# Altium PCB unrouted.PcbDoc
Units mil, origin at the board's own origin, x right, y up, seen from the top; angles counter-clockwise.
Board outline 1135 x 2850 mil, 2 copper layers (Top Layer, Bottom Layer); 54 components, 49 nets, 266 pads, 31 vias.
Unrouted connection lines stored in the file: 91.
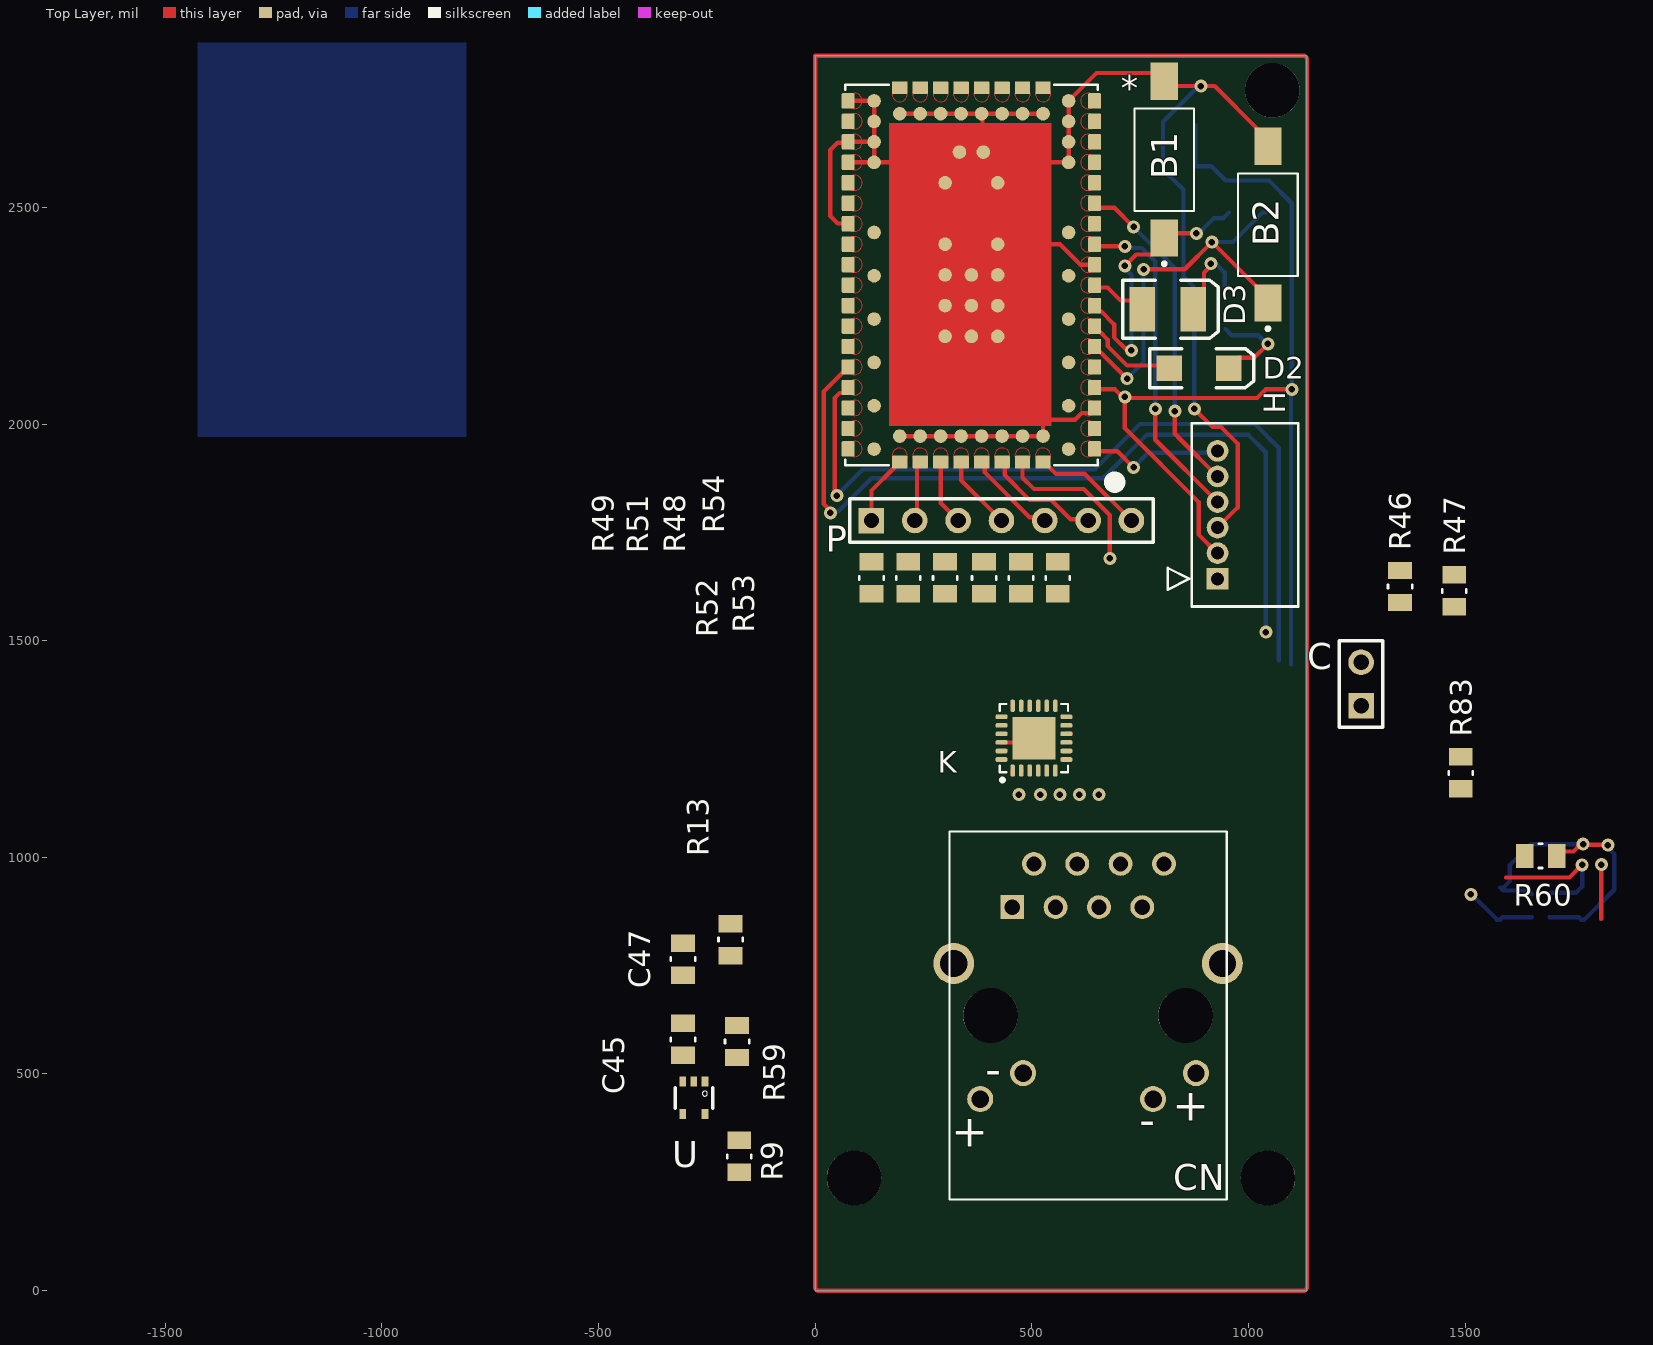
[diagram p0: Top Layer view]
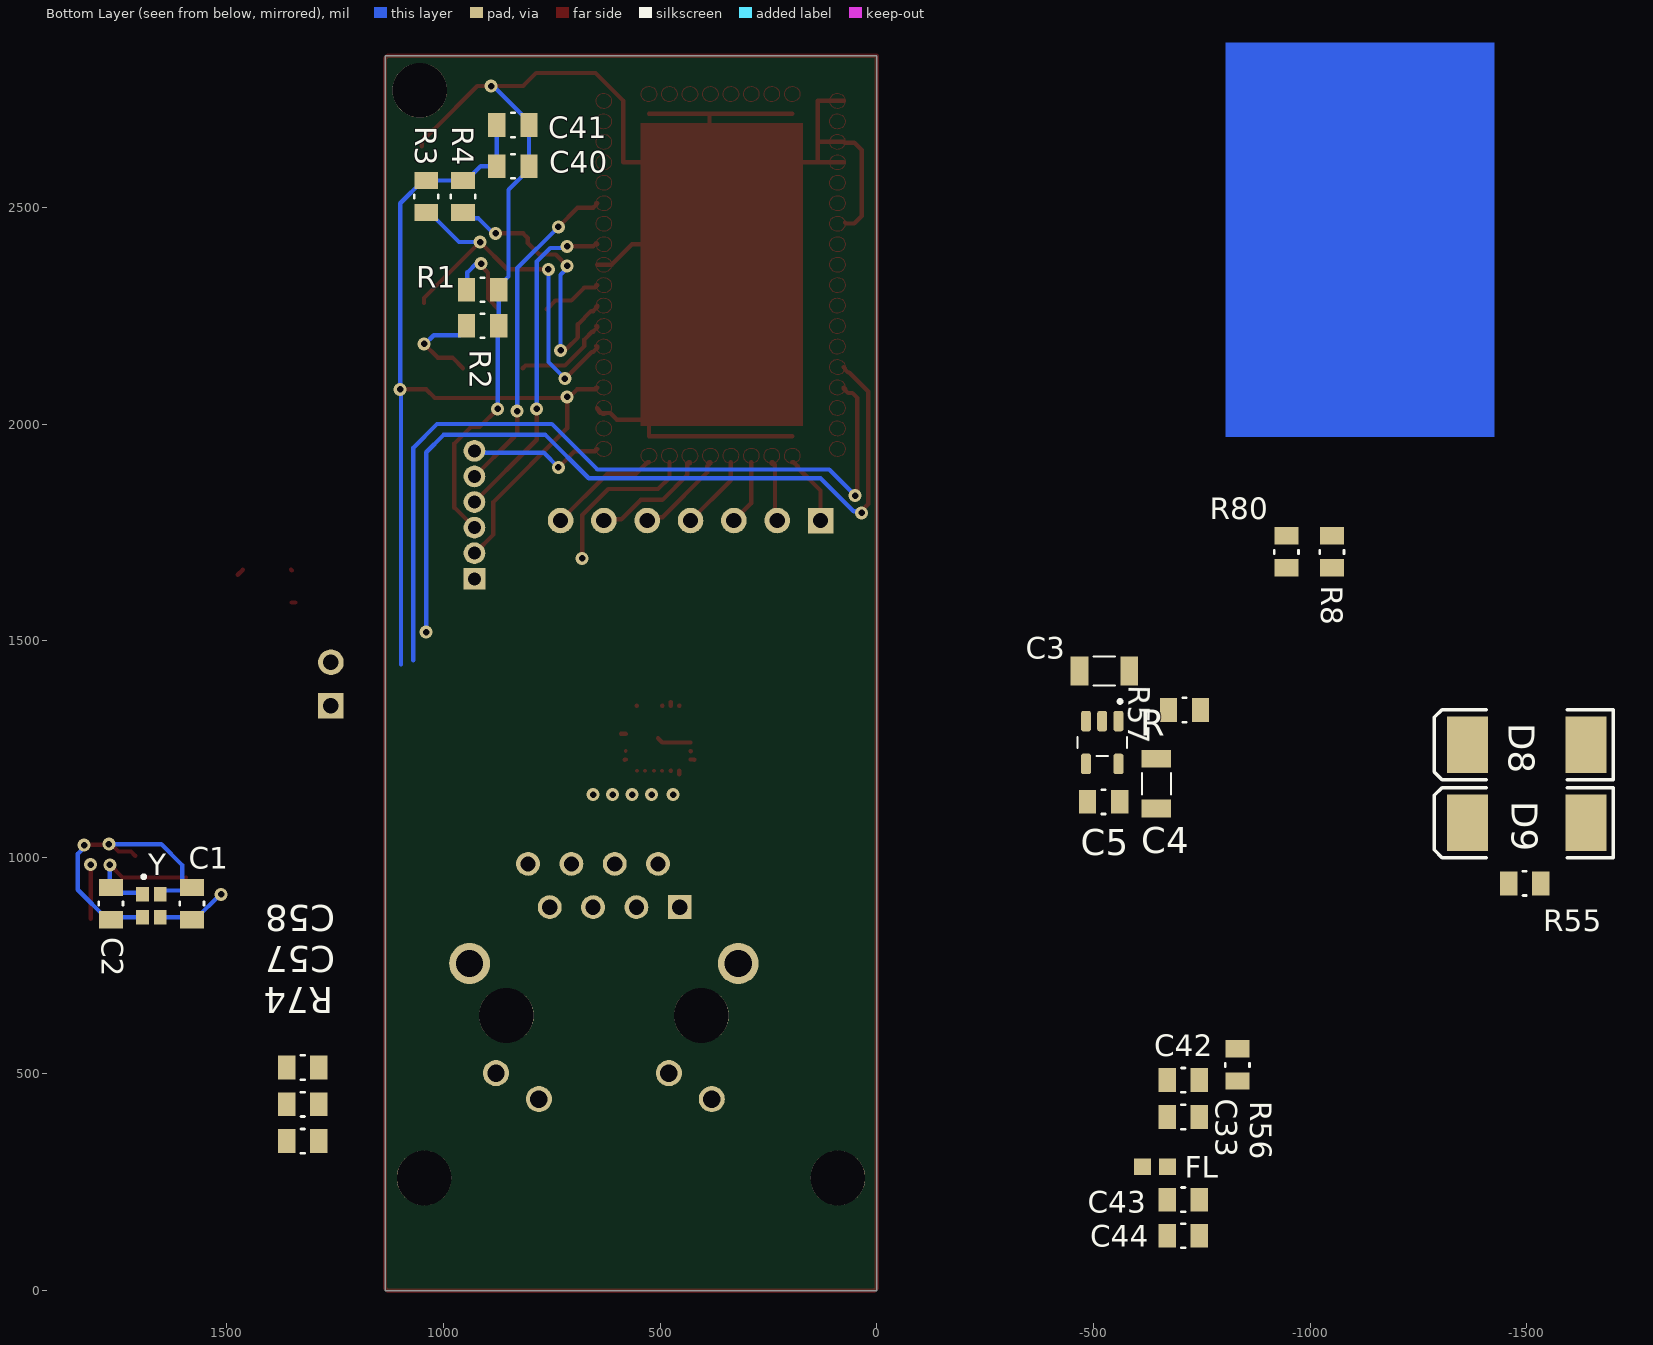
[diagram p1: Bottom Layer view, seen from below]

## Layer stack, top to bottom
Top Solder: solder mask 0.4, Solder Resist, Dk 3.5
Top Layer: signal copper 1.4
Dielectric 1: dielectric 12.6, FR-4, Dk 4.8
Bottom Layer: signal copper 1.4
Bottom Solder: solder mask 0.4, Solder Resist, Dk 3.5

## Board outline
0,2850 0,0 1135,0 1135,2850

## Design rules (kind name [scope] priority, off if disabled: settings)
Clearance [All] p1: gap=5 ignorepadtopadclearanceinfootprint=FALSE // Default=10mil
DiffPairsRouting [All] p1: maxlimit=10 minlimit=10 mostfreqgap=10 toplayer_minwidth=8 toplayer_maxwidth=15 toplayer_prefwidth=15 bottomlayer_minwidth=15 bottomlayer_maxwidth=15 bottomlayer_prefwidth=15 maxuncoupledlength=500 // DefaultMinWidth=15mil
HoleSize [All] p1: absolutevalues=TRUE maxlimit=150 minlimit=1 maxpercent=80.000 minpercent=20.000 // MaximumDefault=100mil
MinimumSolderMaskSliver [All] p1: minsoldermaskwidth=1 // Default=10mil
PolygonConnect [All] p1: connectstyle=Relief reliefconductorwidth=10 reliefentries=4 polygonreliefangle="90 Angle" airgapwidth=10
RoutingVias [All] p1: holewidth=28 width=50 viastyle="Through Hole" minholewidth=28 minwidth=50 maxholewidth=28 maxwidth=50
SilkToSolderMaskClearance [IsPad] p1: minsilkscreentomaskgap=4 clearancetoexposedcopper=TRUE // Default=10mil
SolderMaskExpansion [All] p1: expansion=4 istentingtop=FALSE
Width [All] p1: maxlimit=10 minlimit=5 preferedwidth=10 toplayer_prefwidth=8 minimp=50.000000 maximp=50.000000 favimp=50.000000 // MinWidthDefault=10mil
26 further rules are at their usual default settings.

## Classes and differential pairs
differential pair PHY_TX: +PHY_TX_P -PHY_TX_N
differential pair PHY_RX: +PHY_RX_P -PHY_RX_N

## Components (designator, comment, footprint, x,y, rotation, side; value= is the part's Value field where it differs from the comment)
* "ODIN-W262" ODIN-W262 360.63,2344.13 r90 top
B1 "push button" TECO-FSMSM 805.68,2610 r90 top
B2 "push button" TECO-FSMSM 1045,2460 r90 top
C "Header 2" HDR1X2 1260,1350 r90 top
C1 "22uF 10V" 0805 1580.84,893.36 r90 bottom value=22uF
C2 "22uF 10V" 0805 1767.82,893.36 r270 bottom value=22uF
C3 "10UF 25V" 1206 -525,1430 r0 bottom value=10uF
C4 "10UF 25V" 1206 -645.09,1170 r270 bottom value=10uF
C5 "10nF 50V" 0805 -523.17,1128.12 r180 bottom value=10nF
C33 "2.2uF 16V" 0805 -707,400.94 r0 bottom value=2.2uF
C40 "100nF 50V" 0805 840,2595 r0 bottom value=100nF
C41 "100nF 50V" 0805 840,2690 r0 bottom value=100nF
C42 "100nF 50V" 0805 -707,485.94 r0 bottom value=100nF
C43 "2.2uF 16V" 0805 -707,209.96 r0 bottom value=2.2uF
C44 "100nF 50V" 0805 -707,126.68 r0 bottom value=100nF
C45 "100nF 50V" 0805 -305,580 r90 top value=100nF
C47 "100nF 50V" 0805 -305,765 r270 top value=100nF
C57 "100nF 50V" 0805 1325,430 r180 bottom value=100nF
C58 "100nF 50V" 0805 1325,515 r180 bottom value=100nF
CN "CN J00-0045NL" "RJ45 J00-0045NL" 630,635 r180 top
D2 "LED2" 3.2X1.6X1.1 886.1,2128.79 r0 top
D3 "LED3" 3.5X2.8X1.9 814.06,2265 r0 top
D8 "Diode" SMC -1500,1260 r0 bottom
D9 "Diode" SMC -1500,1080 r0 bottom
FL "BLM18PG300SN1D" BEADC1608X95N -642,285.94 r180 bottom
H "S6B-ZR(LF)(SN)" S6B-ZR_JST 928.78,1642.83 r90 top
K "KSZ8081RNAIA-TR" QFN50P400X400X90-25N 505,1275 r90 top
P "Header 7" HDR1X7 130,1777.23 r0 top
R "LP2992IM5-1.8" SOT95P280X145-5N -520,1265 r270 bottom
R1 "270" 0805 910,2310 r0 bottom
R2 "270" 0805 910,2226.72 r0 bottom
R3 "1k" 0805 1040,2525 r90 bottom
R4 "1k" 0805 955,2525 r90 bottom
R8 "JUMPER" 0805 -1050,1705 r90 bottom value=0
R9 "120" 0805 -175,310 r90 top
R13 "1k" 0805 -195,810 r270 top
R46 "10.0" 0805 1350,1625 r90 top
R47 "10.0" 0805 1475,1615 r90 top
R48 "10.0" 0805 300,1645 r270 top
R49 "10.0" 0805 130,1645 r270 top
R51 "10.0" 0805 215,1645 r270 top
R52 "10.0" 0805 475,1645 r90 top
R53 "10.0" 0805 560,1645 r90 top
R54 "10.0" 0805 390,1645 r90 top
R55 "1k" 0805 -1495,940 r0 bottom
R56 "1k" 0805 -832,520.94 r270 bottom
R57 "1k" 0805 -710,1340 r180 bottom
R59 "1k" 0805 -180,575 r270 top
R60 "6.8k" 0805 1674.33,1003.43 r180 top
R74 "16m" 0805 1325,345 r0 bottom
R80 "JUMPER" 0805 -945,1705 r90 bottom value=0
R83 "4.7k" 0805 1490,1195 r270 top
U "NC7SZ125" SC70-5 -280,445 r180 top
Y "ECS-250-10-37-JTN-TR" XTAL_ECS-250-10-37-JTN-TR 1674.33,888.43 r270 bottom

## Footprints (in the part's own frame and the unit in brackets; to place one, negate y for a bottom-side part, rotate by r counter-clockwise, add the part's x,y. Pads: shape width x height; smd on the part's side, far side on the other; paste and mask are expansions set on the pad)
3.2X1.6X1.1 [mm]
  rect 1.5x1.5 smd: 1(-1.75,0) 2(1.75,0)
  silkscreen extent -2.9,-1.15 3.2,1.15
3.5X2.8X1.9 [mm] "SM LED; 2 C-Bend Leads; Body 3.5 x 2.8 x 1.9 mm, inc leads (LxWxH typ)"
  rect 1.5x2.6 smd: 1(-1.5,0) 2(1.5,0)
  silkscreen extent -2.65,-1.7 2.95,1.7
0805 [mil]
  rect 40x55 smd: 1(-37,0) 2(37,0)
  silkscreen extent -4,-28 4,28
1206 [mm]
  rect 1.05x1.72 smd: 1(-1.46,0) 2(1.46,0)
  silkscreen extent -0.62,-0.85 0.62,0.85
BEADC1608X95N [mm]
  rect 1x0.97 smd: 1(-0.735,0) 2(0.735,0)
HDR1X2 [mm] "Connector; Header; 2 Position"
  rect 1.5x1.5 hole 0.9: 1(0,0)
  round 1.5 hole 0.9: 2(2.54,0)
  silkscreen extent -1.27,-1.27 3.81,1.27
HDR1X7 [mm] "Connector; Header; 7 Position"
  rect 1.5x1.5 hole 0.9: 1(0,0)
  round 1.5 hole 0.9: 2(2.54,0) 3(5.08,0) 4(7.62,0) 5(10.16,0) 6(12.7,0) 7(15.24,0)
  silkscreen extent -1.27,-1.27 16.51,1.27
ODIN-W262 [mm]
  round 0.8 smd: 1(6.6,-5.7) 2(7.8,-5.7) 3(9,-5.7) 4(10.2,-5.7) 5(9.45,-4.2) 6(9.45,-3) 7(9.45,-1.8) 8(9.45,-0.6) 9(9.45,0.6) 10(9.45,1.8) 11(9.45,3) 12(9.45,4.2) 13(10.2,5.7) 14(9,5.7) 15(7.8,5.7) 16(6.6,5.7) 17(-9.45,4.2) 18(-9.45,3) 19(-9.45,1.8) 20(-9.45,0.6) 21(-9.45,-0.6) 22(-9.45,-1.8) 23(-9.45,-3) 24(-9.45,-4.2) 25(-3.6,-1.54) 26(-1.8,-1.54) 27(0,-1.54) 28(1.8,-1.54) 29(5.4,-1.54) 30(7.2,-0.7) 31(-3.6,0) 32(-1.8,0) 33(0,0) 34(-3.6,1.54) 35(-1.8,1.54) 36(0,1.54) 37(1.8,1.54) 38(5.4,1.54) 39(7.2,0.7) TP1(2.49,-5.7) TP2(2.49,5.7) TP3(-0.05,-5.7) TP4(-0.05,5.7) TP5(-2.59,-5.7) TP6(-2.59,5.7) TP7(-5.13,-5.7) TP8(-5.13,5.7) TP9(-7.67,-5.7) TP10(-7.67,5.7) TP11(-10.21,-5.7) TP12(-10.21,5.7)
  rrect15% 0.9x0.75 smd paste-1 mask+0: A1(-10.2,-7.225) A2(-9,-7.225) A3(-7.8,-7.225) A4(-6.6,-7.225) A5(-5.4,-7.225) A6(-4.2,-7.225) A7(-3,-7.225) A8(-1.8,-7.225) A9(-0.6,-7.225) A10(0.6,-7.225) A11(1.8,-7.225) A12(3,-7.225) A13(4.2,-7.225) A14(5.4,-7.225) A15(6.6,-7.225) A16(7.8,-7.225) A17(9,-7.225) A18(10.2,-7.225) C1(10.2,7.225) C2(9,7.225) C3(7.8,7.225) C4(6.6,7.225) C5(5.4,7.225) C6(4.2,7.225) C7(3,7.225) C8(1.8,7.225) C9(0.6,7.225) C10(-0.6,7.225) C11(-1.8,7.225) C12(-3,7.225) C13(-4.2,7.225) C14(-5.4,7.225) C15(-6.6,7.225) C16(-7.8,7.225) C17(-9,7.225) C18(-10.2,7.225)
  rrect15% 0.75x0.9 smd paste-1 mask+0: B1(10.975,-4.2) B2(10.975,-3) B3(10.975,-1.8) B4(10.975,-0.6) B5(10.975,0.6) B6(10.975,1.8) B7(10.975,3) B8(10.975,4.2) D1(-10.975,4.2) D2(-10.975,3) D3(-10.975,1.8) D4(-10.975,0.6) D5(-10.975,-0.6) D6(-10.975,-1.8) D7(-10.975,-3) D8(-10.975,-4.2)
  Top Layer circle w0: c4.2,-6.85 r0.45
  Top Layer circle w0: c3,-6.85 r0.45
  Top Layer circle w0: c5.4,-6.85 r0.45
  Top Layer circle w0: c6.6,-6.85 r0.45
  Top Layer circle w0: c7.8,-6.85 r0.45
  Top Layer circle w0: c9,-6.85 r0.45
  Top Layer circle w0: c10.2,-6.85 r0.45
  Top Layer circle w0: c-9,-6.85 r0.45
  Top Layer circle w0: c-5.4,-6.85 r0.45
  Top Layer circle w0: c1.8,6.85 r0.45
  Top Layer circle w0: c0.6,6.85 r0.45
  Top Layer circle w0: c-0.6,6.85 r0.45
  Top Layer circle w0: c-1.8,6.85 r0.45
  Top Layer circle w0: c-3,6.85 r0.45
  Top Layer circle w0: c-4.2,6.85 r0.45
  Top Layer circle w0: c-7.8,6.85 r0.45
  Top Layer circle w0: c-9,6.85 r0.45
  Top Layer circle w0: c-10.2,6.85 r0.45
  Top Layer circle w0: c9,6.85 r0.45
  Top Layer circle w0: c5.4,6.85 r0.45
  Top Layer circle w0: c4.2,6.85 r0.45
  Top Layer circle w0: c10.6,-4.2 r0.45
  Top Layer circle w0: c10.6,-3 r0.45
  Top Layer circle w0: c10.6,-1.8 r0.45
  Top Layer circle w0: c10.6,-0.6 r0.45
  Top Layer circle w0: c10.6,0.6 r0.45
  Top Layer circle w0: c10.6,1.8 r0.45
  Top Layer circle w0: c10.6,3 r0.45
  Top Layer circle w0: c10.6,4.2 r0.45
  Top Layer circle w0: c10.2,6.85 r0.45
  Top Layer circle w0: c-3,-6.85 r0.45
  Top Layer lines w0: -5.414,7.3 cw(c-5.4,6.85) -5.4,6.4 cw(c-5.4,6.85) -5.667,6.488 cw(c-5.4,6.85) -5.486,7.292 cw(c-5.4,6.85) -5.414,7.3 ; 2.968,7.299 ccw(c3,6.85) 3,6.4 ccw(c3,6.85) 3.131,7.281 ccw(c3,6.85) 3.07,7.295 ccw(c3,6.85) 2.968,7.299 ; 6.53,7.295 ccw(c6.6,6.85) 6.6,6.4 ccw(c6.6,6.85) 6.53,7.295 ; -6.731,7.281 cw(c-6.6,6.85) -6.6,6.4 cw(c-6.6,6.85) -6.731,7.281 ; 7.669,7.281 cw(c7.8,6.85) 7.8,6.4 cw(c7.8,6.85) 7.669,7.281 ; -11.031,4.331 cw(c-10.6,4.2) -10.6,3.75 cw(c-10.6,4.2) -11.045,4.13 cw(c-10.6,4.2) -11.05,4.2 cw(c-10.6,4.2) -11.05,4.207 cw(c-10.6,4.2) -11.047,4.251 cw(c-10.6,4.2) -11.045,4.27 cw(c-10.6,4.2) -11.042,4.286 cw(c-10.6,4.2) -11.031,4.331 ; -11.037,3.107 ccw(c-10.6,3) -11.045,3.07 ccw(c-10.6,3) -11.05,3 ccw(c-10.6,3) -10.6,2.55 ccw(c-10.6,3) -11.037,3.107 ; -11.05,1.8 ccw(c-10.6,1.8) -10.6,1.35 ccw(c-10.6,1.8) -11.05,1.8 ; -11.047,0.651 ccw(c-10.6,0.6) -11.05,0.6 ccw(c-10.6,0.6) -11.031,0.469 ccw(c-10.6,0.6) -10.6,0.15 ccw(c-10.6,0.6) -11.047,0.651 ; -11.05,-0.6 cw(c-10.6,-0.6) -10.6,-1.05 cw(c-10.6,-0.6) -11.031,-0.731 cw(c-10.6,-0.6) -11.05,-0.619 cw(c-10.6,-0.6) -11.05,-0.6 ; -11.048,-1.762 ccw(c-10.6,-1.8) -11.05,-1.8 ccw(c-10.6,-1.8) -11.045,-1.87 ccw(c-10.6,-1.8) -11.039,-1.901 ccw(c-10.6,-1.8) -11.031,-1.931 ccw(c-10.6,-1.8) -10.6,-2.25 ccw(c-10.6,-1.8) -11.048,-1.762 ; -11.031,-2.869 cw(c-10.6,-3) -10.6,-3.45 cw(c-10.6,-3) -11.031,-3.131 cw(c-10.6,-3) -11.034,-3.118 cw(c-10.6,-3) -11.042,-3.086 cw(c-10.6,-3) -11.043,-3.076 cw(c-10.6,-3) -11.049,-3.032 cw(c-10.6,-3) -11.05,-3 cw(c-10.6,-3) -11.031,-2.869 ; -11.05,-4.2 cw(c-10.6,-4.2) -10.6,-4.65 cw(c-10.6,-4.2) -10.975,-4.449 cw(c-10.6,-4.2) -11.031,-4.331 cw(c-10.6,-4.2) -11.05,-4.2 ; 0.6,-6.4 ccw(c0.6,-6.85) 0.6,-7.3 ccw(c0.6,-6.85) 0.6,-6.4 ; -8.067,-6.488 cw(c-7.8,-6.85) -7.8,-7.3 cw(c-7.8,-6.85) -8.098,-6.513 cw(c-7.8,-6.85) -8.067,-6.488 ; -10.069,-7.281 cw(c-10.2,-6.85) -10.114,-7.292 cw(c-10.2,-6.85) -10.2,-7.3 cw(c-10.2,-6.85) -10.27,-7.295 cw(c-10.2,-6.85) -10.069,-7.281 ; -0.514,-7.292 ccw(c-0.6,-6.85) -0.67,-7.295 ccw(c-0.6,-6.85) -0.6,-7.3 ccw(c-0.6,-6.85) -0.514,-7.292 ; -6.67,-7.295 ccw(c-6.6,-6.85) -6.6,-7.3 ccw(c-6.6,-6.85) -6.67,-7.295 ; -1.87,-7.295 cw(c-1.8,-6.85) -1.8,-7.3 cw(c-1.8,-6.85) -1.87,-7.295 ; 1.87,-7.295 cw(c1.8,-6.85) 1.849,-7.297 cw(c1.8,-6.85) 1.8,-7.3 cw(c1.8,-6.85) 1.87,-7.295 ; -4.169,-7.299 cw(c-4.2,-6.85) -4.2,-7.3 cw(c-4.2,-6.85) -4.169,-7.299
  silkscreen extent -12.4,-8.65 11.15,7.4, body extent -11.15,-7.4 11.15,7.4, height 4.8
QFN50P400X400X90-25N [mm]
  rrect70% 0.71x0.27 smd: 1(-1.9,1.25) 2(-1.9,0.75) 3(-1.9,0.25) 4(-1.9,-0.25) 5(-1.9,-0.75) 6(-1.9,-1.25) 13(1.9,-1.25) 14(1.9,-0.75) 15(1.9,-0.25) 16(1.9,0.25) 17(1.9,0.75) 18(1.9,1.25)
  rrect70% 0.27x0.71 smd: 7(-1.25,-1.9) 8(-0.75,-1.9) 9(-0.25,-1.9) 10(0.25,-1.9) 11(0.75,-1.9) 12(1.25,-1.9) 19(1.25,1.9) 20(0.75,1.9) 21(0.25,1.9) 22(-0.25,1.9) 23(-0.75,1.9) 24(-1.25,1.9)
  rect 2.5x2.5 smd paste-2: 25(0,0)
  silkscreen extent -2.55,-2 2,2
"RJ45 J00-0045NL" [mm]
  rect 1.398x1.398 hole 0.89: 1(4.445,-6.35)
  round 1.398 hole 0.89: 2(3.175,-8.89) 3(1.905,-6.35) 4(0.635,-8.89) 5(-0.635,-6.35) 6(-1.905,-8.89) 7(-3.175,-6.35) 8(-4.445,-8.89)
  round 1.53 hole 1.02: 9(6.325,4.9) 10(3.81,3.38) 11(-3.81,4.9) 12(-6.325,3.38)
  round 3.2 hole 3.2 unplated: None(-5.715,0) None(5.715,0)
  round 2.4 hole 1.6: S1(-7.875,-3.05) S2(7.875,-3.05)
  silkscreen extent -8.13,-10.8 8.13,10.8
S6B-ZR_JST [mil]
  rect 50x50 hole 30 mask+0: 1(0,0)
  round 50 hole 30 mask+0: 2(59.06,0) 3(118.11,0) 4(177.17,0) 5(236.22,0) 6(295.28,0)
  silkscreen extent -64,-186 359,115, body extent 0,0 10,10, height 10
SC70-5 [mm]
  rect 0.4x0.6 smd: 1(-0.65,-0.95) 2(0,-0.95) 3(0.65,-0.95) 4(0.65,0.95) 5(-0.65,0.95)
  silkscreen extent -1.1,-0.6 1.1,0.6
SMC [mm] "DO-214-AB/SMC; 2 C-Bend Leads; Body 7.9 x 5.9 mm, inc. leads (LxW)"
  rect 2.4x3.3 smd: 1(-3.475,0) 2(3.475,0)
  silkscreen extent -5.07,-2.05 5.43,2.05
SOT95P280X145-5N [mm]
  rrect50% 1.21x0.59 smd: 1(-1.255,0.95) 2(-1.255,0) 3(-1.255,-0.95) 4(1.255,-0.95) 5(1.255,0.95)
  silkscreen extent -2.51,-1.45 0.8,1.45
TECO-FSMSM [mm]
  rect 2.19x1.6 smd: 1(-4.59,0) 2(4.59,0)
  silkscreen extent -6.2,-1.75 3,1.75
XTAL_ECS-250-10-37-JTN-TR [mm]
  rect 0.85x0.75 smd: 1(-0.675,-0.525) 2(0.675,-0.525) 3(0.675,0.525) 4(-0.675,0.525)
  silkscreen extent -1.8,-0.55 -1.6,-0.35

## Part data
B1 B2: library part Teco-FSMSM
C: "Header, 2-Pin", LatestRevisionDate=17-Jul-2002, LatestRevisionNote="Re-released for DXP Platform.", Publisher="Altium Limited"
C1 C2: library part "CAP 22uF 10V", "CAP CER 2.2UF 10V X5R 0805", Operating Temperature="-55°C ~ 85°C", Package=0805, Rating=10V, Temperature Coefficient=X5R, Tolerance=20%
C3 C4: library part "CAP 10uF 25V", "CAP CER 10UF 25V X5R 1206", Operating Temperature="-55°C ~ 85°C", Package=1206, Rating=25V, Temperature Coefficient=X5R, Tolerance=10%
C5: library part "CAP 10nF 50V", "CAP CER 10000PF 50V X7R 0805", Operating Temperature="-55°C ~ 125°C", Package=0805, Rating=50V, Temperature Coefficient=X7R, Tolerance=10%
C33 C43: library part "CAP 2.2uF 16V", "CAP CER 2.2UF 16V X7R 0805", Operating Temperature="-55°C ~ 125°C", Package=0805, Rating=16V, Temperature Coefficient=X7R, Tolerance=10%
C40 C41 C42 C44 C45 C47 C57 C58: library part "CAP 100nF 50V", "CAP CER 0.1UF 50V X7R 0805", Package=0805, Rating=50V, Tolerance=10%
CN: library part "CN MAGJACK", "CN MAGJACK 1PORT 100 BASE-TX", Package=None, Supplier Part Number 1=673-J00-0045NL, Digikey=553-1619-5-ND, Digikey Link=https://www.digikey.com/product-detail/en/pulse-electronics-network/J00-0045NL/553-1619-5-ND/1036860?utm_source=snapeda&utm_medium=aggregator&utm_campaign=symbol, MF="Pulse Electronics", MP=J00-0045NL, SnapEDA_Link=https://www.snapeda.com/parts/J00-0045NL/Pulse%20Electronics%20Network/view-part/87956/?ref=snap, Supplier 1=Mouser
D2: library part "LED RED SMD", "Typical RED, GREEN, YELLOW, AMBER GaAs LED", Color=Red, Current - Test=20mA, Lens Color=Colorless, Package=1206, Voltage - Forward (Vf) (Typ)=1.7V, Lens Transparency=Clear
D3: "Typical BLUE SiC LED", DatasheetVersion=16-Apr-2002, LatestRevisionDate=17-Dec-2003, LatestRevisionNote="PCB Footprint replaced.", PackageDescription="SM LED; 2 C-Bend Leads; Body 3.5 x 2.8 x 1.9 mm, inc leads (LxWxH typ)", PackageReference=3.5X2.8X1.9, PackageVersion=16-Apr-2002, Published=8-Jun-2000, Publisher="Altium Limited"
D8 D9: "Default Diode", Code_JEDEC=DO-214-AB, LatestRevisionDate=17-Jul-2002, LatestRevisionNote="Re-released for DXP Platform.", PackageDescription="DO-214-AB/SMC; 2 C-Bend Leads; Body 7.9 x 5.9 mm, inc. leads (LxW)", PackageReference=SMC, PackageVersion=Sep-1996, Published=8-Jun-2000, Publisher="Altium Limited"
FL: "30 Ohms @ 100MHz 1 Power Line Ferrite Bead 0603 _1608 Metric_ 1A 50mOhm", Package="1608 Murata", Availability=Unavailable, MF=Murata, MP=BLM18PG300SN1D, Price=None, SnapEDA_Link=https://www.snapeda.com/parts/BLM18PG300SN1D/Murata/view-part/270173/?ref=snap
H: "No Description Available", Built_By=EMA_UL_Team, Copyright="Copyright (C) 2018 Accelerated Designs. All rights reserved", Manufacturer_Part_Number=S6B-ZR(LF)(SN), RefDes=RefDes, SourceLibrary=JST_2017-04-18, Type=DEV, Vendor=JST
K: "1/1 Transceiver Full RMII 24-QFN _4x4_", Package="QFN-24 Microchip", Availability=Unavailable, MF=Microchip, MP=KSZ8081RNAIA-TR, Price=None, SnapEDA_Link=https://www.snapeda.com/parts/KSZ8081RNAIA-TR/Microchip/view-part/482545/?ref=snap
P: "Header, 7-Pin", LatestRevisionDate=17-Jul-2002, LatestRevisionNote="Re-released for DXP Platform.", Publisher="Altium Limited"
R: Package=None, Availability=Unavailable, MP=LP2992IM5-1.8/NOPB, Price=None
R1 R2: library part "RES 270 1/8W", "RES SMD 270 OHM 5% 1/8W 0805", Package=0805, Power (Watts)=0.125W, Tolerance=5%
R3 R4 R13 R55 R56 R57 R59: library part "RES 1k 1/8W", "RES SMD 1K OHM 5% 1/8W 0805", Package=0805, Power (Watts)=0.125W, Tolerance=5%
R8 R80: library part "RES 0 JUMPER", "RES SMD 0 OHM JUMPER GENERIC 0805", Package=0805
R9: library part "RES 120.0 1/8W", "RES SMD 120 OHM 5% 1/8W 0805", Package=0805, Power (Watts)=0.125W, Tolerance=5%
R46 R47 R48 R49 R51 R52 R53 R54: library part "RES 10.0 1/8W - 5%", "RES SMD 10.0 OHM 5% 1/8W 0805", Package=0805, Power (Watts)=0.125W, Tolerance=5%
R60: library part "RES 6.8k 1/8W", "RES SMD 6.8K OHM 5% 1/8W 0805", Package=0805, Power (Watts)=0.125W, Tolerance=5%
R74: library part "RES 16m 1/2W", "RES SMD 0.016 OHM 1% 1/2W 0805 Thick Film", Case Code (Imperial)=0805, Case Code (Metric)=2012, Manufacturer=Panasonic, Manufacturer Part Number=ERJ-6BWFR016V, Max Operating Temperature=155°C, Max Power Dissipation=500mW, Min Operating Temperature=-55°C, Package Quantity=1, Resistance=16mR, Supplier Part Number 1=P.016AQCT-ND, Temperature Coefficient=200ppm/°C, Tolerance=1%, Case/Package=0805, Category="Chip SMD Resistors", ComponentLink1Description=https://datasheet.ciiva.com/11808/0900766b8126441d-11808690.pdf?src-supplier=RSComponents, ComponentLink1URL=https://datasheet.ciiva.com/11808/0900766b8126441d-11808690.pdf?src-supplier=RSComponents, ComponentLink2Description=https://datasheet.ciiva.com/2452/aoa0000ce3-2452594.pdf?src-supplier=Digi-Key, ComponentLink2URL=https://datasheet.ciiva.com/2452/aoa0000ce3-2452594.pdf?src-supplier=Digi-Key, ComponentLink3Description=https://datasheet.ciiva.com/2452/aoa0000ce3-2452592.pdf?src-supplier=Digi-Key, ComponentLink3URL=https://datasheet.ciiva.com/2452/aoa0000ce3-2452592.pdf?src-supplier=Digi-Key, ComponentLink4Description=https://datasheet.ciiva.com/2452/aoa0000ce3-2452593.pdf?src-supplier=Digi-Key, ComponentLink4URL=https://datasheet.ciiva.com/2452/aoa0000ce3-2452593.pdf?src-supplier=Digi-Key, ComponentLink5Description=https://datasheet.ciiva.com/9192/aoa0000ce3-9192761.pdf?src-supplier=Avnet, ComponentLink5URL=https://datasheet.ciiva.com/9192/aoa0000ce3-9192761.pdf?src-supplier=Avnet, ComponentLink6Description=https://datasheet.ciiva.com/17211/aoa0000ce3-17211370.pdf?src-supplier=Avnet+Europe, ComponentLink6URL=https://datasheet.ciiva.com/17211/aoa0000ce3-17211370.pdf?src-supplier=Avnet+Europe, Composition="Thick Film", Contact Plating=Tin, Depth=1.25mm, Features="Automotive AEC-Q200", Height=0.028inch, Lead Free="Lead Free", Length=2mm, Military Standard=Not, Mount="Surface Mount", Number of Pins=2, Number of Terminations=2, Packaging="Tape and Reel", Power Rating=500mW, Pricing 1="1=0.65000, 10=0.53800, 100=0.36140, 1000=0.21148, 2500=0.20917 (USD)", Radiation Hardening=No, RoHS=Yes, Stock 1=4585, Supplier 1=Digi-Key, Termination=SMD/SMT, Width=0.049inch
R83: library part "RES 4.7k 1/8W - 5%", "RES SMD 4.7k OHM 5% 1/8W 0805", Package=0805, Power (Watts)=0.125W, Tolerance=5%
U: "Buffer, Non-Inverting 1 Element 1 Bit per Element 3-State Output SC-70-5", Package="SC-70 ON Semiconductor", Availability=Unavailable, MF="ON Semiconductor", MP=NC7SZ125, Price=None, SnapEDA_Link=https://www.snapeda.com/parts/NC7SZ125/ON%20Semiconductor/view-part/2686816/?ref=snap
Y: "SMD Crystal 2.0 x 1.6 x 0.45 mm ceramic package", Package=None, Availability=Unavailable, MP=ECS-250-10-37-JTN-TR, Price=None

## Free pads (board coordinates)
  round 125.98 hole 125.98 unplated: 6(90,260) 6(1045,260) 6(1055,2770)

## Via types
v1: diameter 30, hole 15, Top Layer to Bottom Layer, 31 vias

## Nets (pads, with @x,y where several pads share a name; then routed paths per layer and width w, separated by ;. In a path a pad name is that pad's centre, name@x,y a point inside that pad or via, vN(x,y) a via of type N, cw(c..) or ccw(c..) an arc to the next point about the centre after c; other vN are vias at no path point)
1v8: C4.1 D9.2 R13.2 R55.2 R57.1 R59.1 R83.1 R.5
3v3: *.A4 C3.1 C40.2 C41.2 CN.4 CN.5 CN.9 FL.1 H.2 R3.2 R4.2 R.1 R.3 U.5 | length 2470.5
  Top Layer w10: *.A4@648.03,2084.29 *.A4 646.56,2082.82 647.82,2081.55 649.37,2080 692.03,2080 709.46,2062.58 v1(714.87,2062.58) ; H.2 928.11,1701.89 885,1745 885,1820 714.87,1990.13 v1(714.87,2062.58) ; v1(1100,2080) 1040,2080 1020,2060 717.45,2060 v1(714.87,2062.58) ; 1814.33,858.43 v1(1814.33,983.43)
  Bottom Layer w10: C41.2 C40.2 914.5,2595 947.5,2562 R4.2 1047.5,2562 1100,2509.5 v1(1100,2080) 1098.09,2078.09 1098.09,1445 ; v1(1814.33,983.43) v1@1814.33,984.28
BlueLED: *.A9 D3.1 | length 138.9
  Top Layer w10: *.A9 *.A9@648.03,2320.51 ; *.A9@647.82,2317.77 650.59,2315 675,2315 705,2285 741.89,2285 D3.1@761.89,2265
BYPASS: C5.1 R.4
CRS_DV: K.15 R54.1
Diode_2: D2.2 R2.2 | length 227.9
  Top Layer w10: D2.2 979.53,2153.32 1013.32,2153.32 v1(1045,2185)
  Bottom Layer w10: R2.2@947,2219.22 961.22,2205 1022.57,2205 1042.57,2185 v1(1045,2185) ; R2.2@947,2241.72 R2.2@948.72,2240
Diode_3: D3.2 R1.2 | length 190.7
  Top Layer w10: D3.2 897.64,2289.53 897.64,2349.12 913.11,2364.59 v1(913.11,2370)
  Bottom Layer w10: v1@925,2370 945,2350 945,2312 R1.2
ETH_CRSDV: *.D4 P.4 R54.2 R57.2 | length 173.3
  Top Layer w10: *.D4 337.01,1909.09 337.01,1870.23 P.4
ETH_MC: C.2 K.10 R47.1 R83.2 | length 10.9
  Top Layer w10: K.10 580.12,1285.16 590.16,1285.16 K.10@590.47,1285.47
ETH_MDIO: C.1 K.11 R46.1 | length 7.5
  Top Layer w10: R46.1@1342.5,1588 R46.1
ETH_REFCLK: *.D8 K.16 P.7 | length 260.3
  Top Layer w10: K.16@494.84,1350.12 K.16 ; *.D8 528.94,1912.05 531.13,1909.86 532.36,1908.63 555.98,1885 622.23,1885 P.7
ETH_RXD0: *.D5 P.5 R52.2 | length 214.7
  Top Layer w10: *.D5@384.25,1909.09 385.05,1909.09 386.84,1907.3 391.86,1902.28 391.86,1888.14 494.9,1785.1 522.13,1785.1 P.5 ; *.D5 387.2,1912.05 *.D5@389.39,1909.86
ETH_RXD1: *.D6 P.6 R53.2 | length 274.7
  Top Layer w10: *.D6@431.5,1909.09 436.64,1909.09 437.4,1909.09 437.4,1882.6 495,1825 545,1825 590,1780 627.23,1780 P.6 ; *.D6 434.45,1912.05 *.D6@436.64,1909.86
ETH_TXD0: *.D1 P.1 R49.1 | length 163.6
  Top Layer w10: P.1 130,1846.77 182.56,1899.33 182.56,1902.28 190.13,1909.86 192.32,1912.05 *.D1
ETH_TXD1: *.D2 P.2 R51.1 | length 144.1
  Top Layer w10: P.2 235,1782.23 235,1906.27 238.02,1909.29 240.77,1912.05 *.D2 ; *.D2@240.37,1906.94 *.D2@242.52,1909.09
ETH_TXEN: *.D3 P.3 R48.1 | length 151.5
  Top Layer w10: *.D3 289.76,1909.09 289.76,1817.47 P.3
GND: *.1 *.2 *.3 *.4 *.5 *.6 *.7 *.8 *.9 *.10 *.11 *.12 *.13 *.14 *.15 *.16 *.17 *.18 *.19 *.20 *.21 *.22 *.23 *.24 *.25 *.26 *.27 *.28 *.29 *.30 *.31 *.32 *.33 *.34 *.35 *.36 *.37 *.38 *.39 *.A3 *.A10 *.C1 *.C3 *.C4 *.C7 B1.2 B2.2 C1.2 C2.2 C3.2 C4.2 C5.2 C33.1 C40.1 C41.1 C42.1 C43.1 C44.1 C45.1 C47.1 C57.2 C58.2 H.3 K.22 K.25 R1.1 R2.1 R56.2 R60.1 R74.1 R.2 U.2 U.3 Y.2 Y.4 | length 6051.3
  Top Layer w10: *.C7@73.44,2464.98 71.18,2462.72 52.28,2462.72 35,2480 35,2632.22 52.28,2649.49 74.45,2649.49 *.C3 108.66,2651.22 *.15 ; *.C4 108.66,2603.98 *.16 ; *.C1 108.66,2745.71 *.13 *.14 *.15 ; *.17 *.18 *.19 *.20 *.21 *.22 *.23 *.24 525.98,2015 ; *.12 *.11 *.10 *.9 *.8 ; *.37 *.36 *.33 ; *.26@425,2270 421.73,2273.27 *.26 *.32 ; K.22 495.16,1265.16 K.25 ; *.5 *.6 *.7 *.8 ; *.A3 645.08,2035.08 635.31,2025.31 617.04,2025.31 615.31,2025.31 600,2010 530.98,2010 525.98,2015 ; *.A10 612.6,2367.76 612.24,2367.76 565,2415 *.28 ; v1(875,2035) 916.91,1993.09 936.91,1993.09 975,1955 975,1807.17 H.3 H.3@929.81,1760.94 ; B2.2@1040.71,2665.54 B2.2@1045,2661.25 ; B2.2@1050,2640.71 1050,2652.32 1023.5,2678.82 922.32,2780 816.39,2780 786.39,2810 649.33,2810 *.4 *.3 *.2 *.1 468.5,2603.98 *.29 ; R60.1 1721.33,1013.43 1750.09,1013.43 1767.01,1030.34 v1(1772.42,1030.34) 1773.37,1029.38 1828.37,1029.38 v1(1829.33,1028.43) ; *.16 *.15 ; *.16 252.76,2603.98 *.38 333.07,2589.8 *.39 *.30 ; *.32 *.33 ; *.32 *.35 *.34 *.31 *.25 525.98,2097.68 525.98,2015 ; *.33 *.27 *.28 ; *.8 386.22,2714.21 386.22,2629.57 *.30 ; *.30 388.19,2589.8 *.29 ; *.28 *.29
  Bottom Layer w10: R2.1 875,2224.72 v1(875,2035) ; R2.1@873,2241.72 873,2317.5 850,2340.5 850,2540.5 803,2587.5 C40.1 C41.1 803,2697.5 885.5,2780 v1(890,2780) ; Y.4 1645.24,923.43 1587.77,923.43 C1.2 1588.34,930.36 1603.34,945.36 1603.34,982.43 1651.24,1030.34 v1(1772.42,1030.34) ; Y.2 1762.33,861.85 C2.2 1775.32,856.36 1844.33,925.36 1844.33,1008.01 1829.33,1023.01 v1(1829.33,1028.43)
INTRP: K.18 R13.1 | length 0.8
  Top Layer w10: K.18@455.47,1350.47 455.47,1350.12 K.18
INV_TO_RJ45: CN.10 R9.1
JUMPERS: D8.2 R8.1 R80.1
KSZ_RST_OUT: D8.1 D9.1 K.24 R55.1 | length 9.1
  Top Layer w10: K.24@421.22,1225.47 421.54,1225.79 K.24
MAIN_RESET: *.A1 H.6 R80.2 | length 320.1
  Top Layer w10: *.A1@648.03,1942.56 *.A1 650.08,1937.56 697.44,1937.56 v1(735,1900)
  Bottom Layer w10: v1(735,1900) 769.06,1934.06 924.72,1934.06 H.6
NetR9_2: R9.2 U.4
PHY_LED0: K.23 R59.2 U.1 | length 0.4
  Top Layer w10: K.23@429.88,1245.16 K.23
PHY_RX_N: CN.6 K.3 | length 1.2
  Top Layer w8: K.3 K.3@496,1199.35
  other v1: 520,1145
PHY_RX_P: CN.3 K.4 | length 1.2
  Top Layer w8: K.4@514,1199.35 K.4
  other v1: 565,1145
PHY_TX_N: CN.2 K.5 | length 1.2
  Top Layer w8: K.5 K.5@535.37,1199.35
  other v1: 610,1145
PHY_TX_P: CN.1 K.6 | length 1.3
  Top Layer w8: K.6@553.37,1199.35 K.6 K.6@554.32,1200.09
  other v1: 655,1145
RedLED: *.A7 D2.1 | length 225.9
  Top Layer w10: *.A7@648.03,2226.02 *.A7 645.08,2223.07 654.84,2213.31 656.69,2213.31 675,2195 675,2180 720,2135 810.99,2135 D2.1
REXT: K.9 R60.2
RJ_45_GND: C57.1 C58.1 CN.8 R74.2
RMII_MDC: *.C15 R47.2 | length 1888.9
  Top Layer w10: v1(50,1835) 50,1840.41 45,1845.41 45,2060 56.57,2071.57 66.42,2071.57 72.51,2077.67 *.C15@72.51,2080.63 ; *.C15@73.99,2079.15 76.18,2081.34 *.C15 ; R47.2@1463.09,1663.91 R47.2
  Bottom Layer w10: v1(50,1835) 110,1895 645,1895 750,2000 1015,2000 1070,1945 1070,1455
RMII_MDIO: *.C14 R46.2 | length 1881.6
  Top Layer w10: v1(35,1795) 35,1800.41 20,1815.41 20,2075 63.82,2118.82 66.42,2118.82 73.55,2125.95 73.55,2128.17 76.18,2130.8 *.C14 ; R46.2 R46.2@1352.1,1664.1
  Bottom Layer w10: v1(35,1795) 38.71,1798.71 53.71,1798.71 130,1875 665,1875 765,1975 1000,1975 1040,1935 v1(1040,1520)
RST_D7: *.D7 R8.2 | length 372.8
  Top Layer w10: *.D7 478.74,1909.71 478.74,1909.09 478.74,1876.26 505,1850 620,1850 680,1790 v1(680,1690)
RXD0: K.13 R52.1 | length 0.4
  Top Layer w10: K.13 K.13@554.53,1350.12
RXD1: K.12 R53.1
RXER: K.17 R56.1 | length 8.7
  Top Layer w10: K.17 K.17@475.47,1358.46
SWITCH0: *.A6 B2.1 R3.1 | length 903.8
  Top Layer w10: *.A6@647.99,2180 646.3,2180 *.A6 645.08,2175.83 654.84,2166.06 658.03,2166.06 719.09,2105 v1(720,2105) ; v1(758.02,2356.98) 852.89,2356.98 v1(915.91,2420) 1045,2290.91 B2.1
  Bottom Layer w10: v1(720,2105) 758.02,2143.02 v1(758.02,2356.98) ; v1@920.91,2420 964.5,2420 1032.5,2488 R3.1
SWITCH1: *.A8 B1.1 R4.1 | length 648.9
  Top Layer w10: *.A8 645.08,2270.32 646.34,2269.05 647.27,2268.13 654.84,2260.55 659.45,2260.55 690,2230 690,2200 716.17,2173.83 726.17,2173.83 v1(730,2170) ; *.A8@647.82,2267.58 *.A8@647.82,2270.53 ; v1(715,2365) 741.18,2391.18 779.18,2391.18 805.68,2417.68 B1.1 816.39,2440 v1(880,2440)
  Bottom Layer w10: v1(715,2365) 715,2359.59 730,2344.59 v1(730,2170) ; v1(880,2440) 885,2440 919.64,2474.64 941.64,2474.64 R4.1
TXD0: K.20 R49.2
TXD1: K.21 R51.2
TXEN: K.19 R48.2
UART_RXD: *.A13 H.5 | length 770.9
  Top Layer w10: *.A13 648.03,2509.49 648.03,2505.8 654.84,2498.99 691.01,2498.99 v1(735,2455) ; v1(830,2030) 830,1977.83 842.83,1965 H.5
  Bottom Layer w10: v1(735,2455) 830,2360 v1(830,2030)
UART_TXD: *.A11 H.4 | length 772.8
  Top Layer w10: *.A11 *.A11@648.03,2415 ; *.A11@647.82,2417.74 647.82,2417.02 647.93,2416.91 654.84,2410 v1(715,2410) ; v1(785,2035) 785,1963.78 H.4
  Bottom Layer w10: v1(715,2410) 718.83,2406.17 753.83,2406.17 785,2375 v1(785,2035)
VDD_1v2: C45.2 C47.2 K.1 | length 8.7
  Top Layer w10: K.1@455.79,1191.54 K.1
VDDA_3.3: C43.2 C44.2 FL.2 K.2 | length 0.4
  Top Layer w10: K.2@475.16,1199.88 K.2
  other v1: 470,1145
VDDIO: C33.2 C42.2 K.14
X0: C1.1 K.7 Y.3 | length 171.7
  Top Layer w10: K.7 581.36,1225.79 K.7@581.68,1225.47 ; v1@1511.21,916.55 v1(1513.08,914.68)
  Bottom Layer w10: v1(1513.08,914.68) 1515.02,914.68 1573.34,856.36 C1.1 1586.33,861.85 Y.3
X1: C2.1 K.8 Y.1 | length 320.8
  Top Layer w8: K.8 K.8@580.17,1245.1
  Top Layer w10: 1594.33,953.43 1740.81,953.43 v1(1770.07,982.69)
  Bottom Layer w10: Y.1 1698.43,918.43 1755.89,918.43 C2.1 1770.07,932.6 v1(1770.07,982.69)
pads on no net: *.A2 *.A5 *.A12 *.A14 *.A15 *.A16 *.A17 *.A18 *.B1 *.B2 *.B3 *.B4 *.B5 *.B6 *.B7 *.B8 *.C2 *.C5 *.C6 *.C8 *.C9 *.C10 *.C11 *.C12 *.C13 *.C16 *.C17 *.C18 *.TP1 *.TP2 *.TP3 *.TP4 *.TP5 *.TP6 *.TP7 *.TP8 *.TP9 *.TP10 *.TP11 *.TP12 CN.7 CN.11 CN.12 CN.None CN.S1 CN.S2 H.1
copper on no net: | length 7959.7
  Top Layer w10: 0,5.86 5.86,0 1129.14,0 1135,5.86 1135,2844.14 1129.14,2850 0,2850 0,5.86

## Other copper
Top Layer:
  rectangle net GND: 170,1995 545,2695
Bottom Layer:
  rectangle: -1425,1970 -805,2880

## Text inside footprints (layer, text, board x,y; h text height)
CN: Top Overlay "+" at 400,395 h73.82 r180; Top Overlay "-" at 430,530 h73.82 r180; Top Overlay "-" at 785.38,414.28 h73.82 r180; Top Overlay "+" at 910,455 h73.82 r180; Mechanical 4 "1" at 429.03,870.93 h73.82 r180; Mechanical 4 "3" at 529.72,870.47 h73.82 r180; Mechanical 4 "5" at 630,871.03 h73.82 r180; Mechanical 4 "7" at 730.34,870.61 h73.82 r180; Mechanical 4 "8" at 780.66,971.28 h73.82 r180; Mechanical 4 "6" at 680.29,971.72 h73.82 r180; Mechanical 4 "4" at 579.88,970.6 h73.82 r180; Mechanical 4 "2" at 479.48,970.98 h73.82 r180; Mechanical 4 "LEFT" at 429.12,255.64 h73.82 r180; Mechanical 4 "RIGHT" at 918.46,256.05 h73.82 r180; Mechanical 4 "FRONT" at 692.68,381.61 h73.82 r180; Mechanical 4 "9" at 384.53,524.61 h73.82 r180; Mechanical 4 "10" at 519.61,589.65 h73.82 r180; Mechanical 4 "11" at 800.37,524.58 h73.82 r180; Mechanical 4 "12" at 935.23,579.79 h73.82 r180; Mechanical 4 "1" at 429.03,870.93 h73.82 r180; Mechanical 4 "3" at 529.72,870.47 h73.82 r180; Mechanical 4 "5" at 630,871.03 h73.82 r180; Mechanical 4 "7" at 730.34,870.61 h73.82 r180; Mechanical 4 "8" at 780.66,971.28 h73.82 r180; Mechanical 4 "6" at 680.29,971.72 h73.82 r180; Mechanical 4 "4" at 579.88,970.6 h73.82 r180; Mechanical 4 "2" at 479.48,970.98 h73.82 r180; Mechanical 4 "LEFT" at 429.12,255.64 h73.82 r180; Mechanical 4 "RIGHT" at 918.46,256.05 h73.82 r180; Mechanical 4 "FRONT" at 692.68,381.61 h73.82 r180; Mechanical 4 "9" at 384.53,524.61 h73.82 r180; Mechanical 4 "10" at 519.61,589.65 h73.82 r180; Mechanical 4 "11" at 800.37,524.58 h73.82 r180; Mechanical 4 "12" at 935.23,579.79 h73.82 r180